# Altium PCB BLDC controller.PcbDoc (part 2 of 2)
Units mm, origin at the board's own origin, x right, y up, seen from the top; angles counter-clockwise.
Board outline 102.51 x 103.12 mm, 2 copper layers (Top Layer, Bottom Layer); 116 components, 83 nets, 325 pads, 163 vias.
Unrouted connection lines stored in the file: 1.
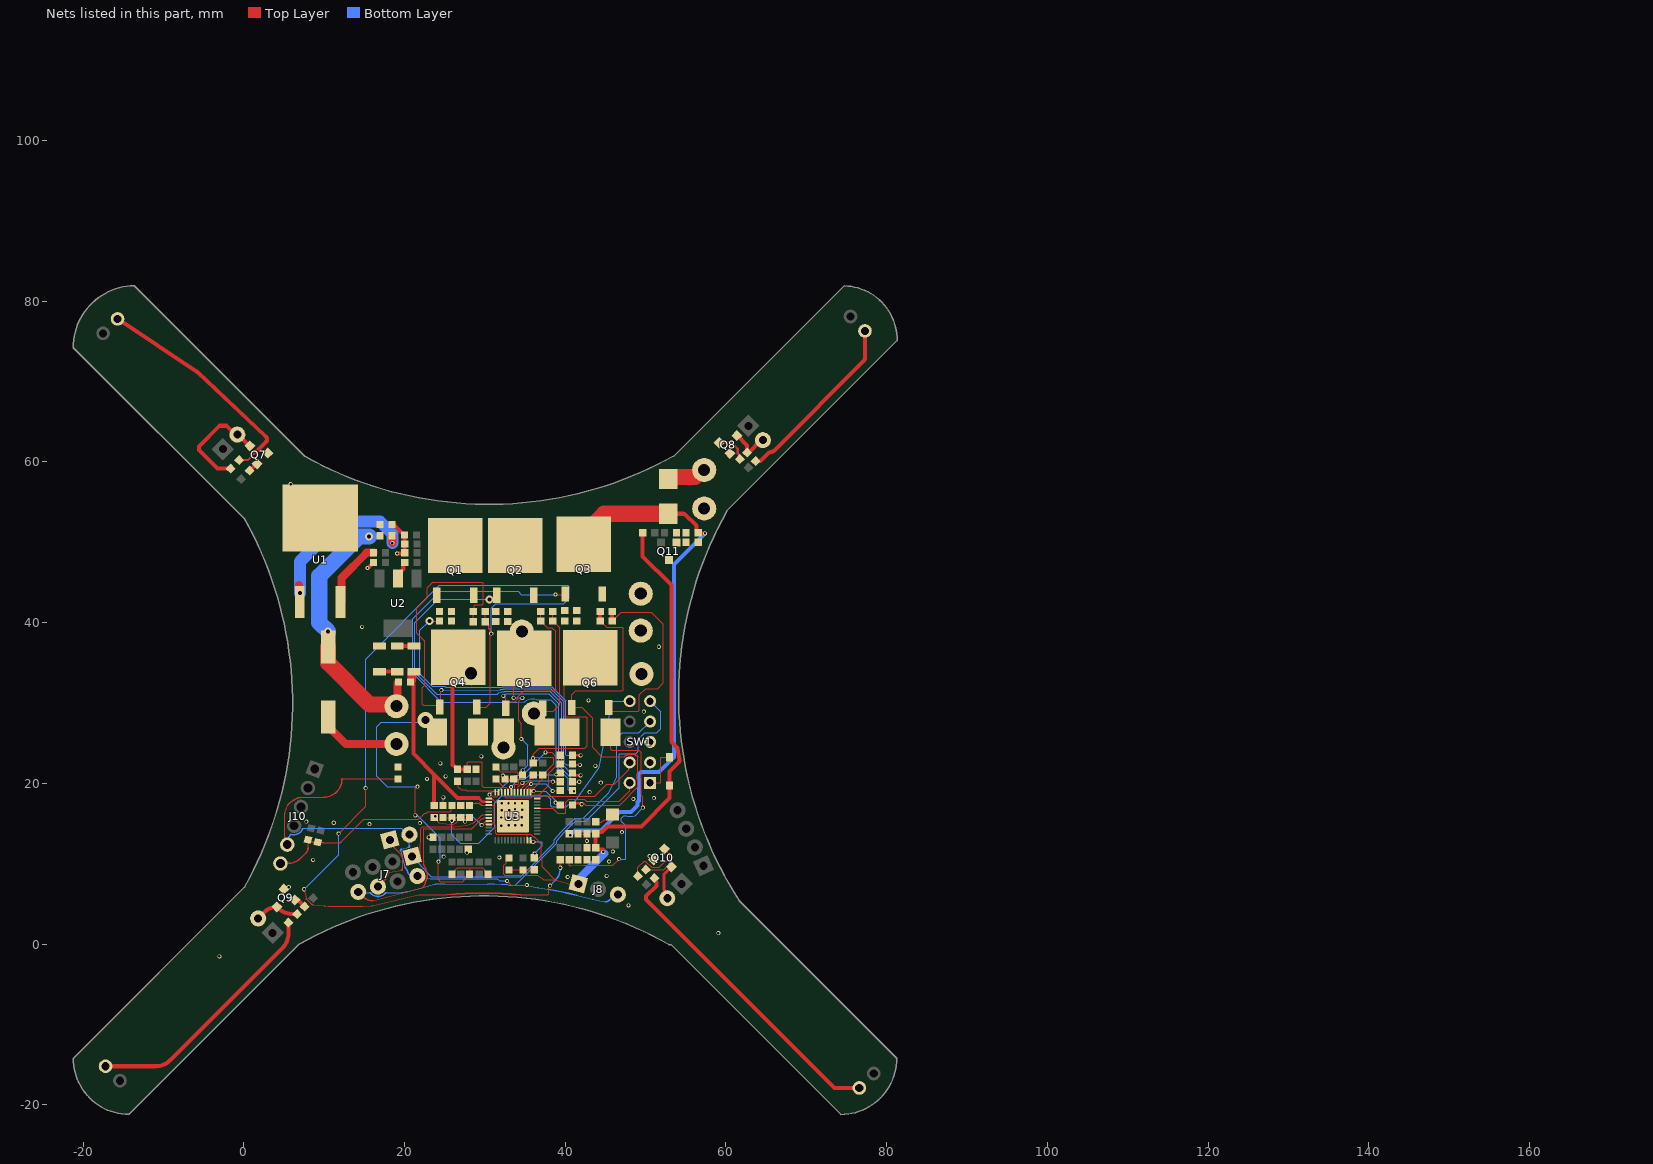
[diagram p2: the nets of this part, all layers, seen from the top]

## Via types
v1: diameter 0.5, hole 0.3, Top Layer to Bottom Layer, tented bottom, 152 vias
v2: diameter 1, hole 0.5, Top Layer to Bottom Layer, tented bottom, 6 vias
v3: diameter 4.3, hole 3.7, Top Layer to Bottom Layer, tented bottom, 4 vias
v4: diameter 2, hole 1, Top Layer to Bottom Layer, tented bottom, 1 vias

## Nets (pads, with @x,y where several pads share a name; then routed paths per layer and width w, separated by ;. In a path a pad name is that pad's centre, name@x,y a point inside that pad or via, vN(x,y) a via of type N, cw(c..) or ccw(c..) an arc to the next point about the centre after c; other vN are vias at no path point) (continued)
DGND: J6.2 J7.2 J8.3 J10.5 R1.2 | length 69.7
  Top Layer w0.15: J10.5@5.1,12.694 5.1,16.2 ; 5.111,16.257 5.465,17.271 ; 7.032,18.273 9.953,18.273 ; 12.23,20.55 R1.2@19.2,20.55 ; v1(32.779,7.855) 33.284,7.35 v1(35.225,7.35)
  Top Layer w0.2: J10.5@5.1,12.694 ccw(c5.417,12.694) J10.5@5.417,12.376 ; 5.1,16.2 cw(c5.3,16.191) 5.111,16.257 ; 5.465,17.271 cw(c5.654,17.204) 5.498,17.329 cw(c6.9,16.2) 5.785,17.613 cw(c8.213,14.536) 7.032,18.273 ; 9.953,18.273 ccw(c9.953,20.55) 12.23,20.55
  Bottom Layer w0.15: 7.317,14.321 7.346,14.35 7.403,14.407 7.45,14.409 18.823,14.409 18.851,14.416 18.972,14.416 18.979,14.409 19.517,14.409 19.671,14.409 19.88,13.629 J6.2@20.627,13.629 20.627,12.242 ; 19.514,11.563 20.032,9.631 ; 19.67,11.832 20.478,12.049 ; 20.074,9.549 20.076,9.546 ; J7.2@21.609,8.459 23.201,8.135 31.565,8.135 31.845,7.855 v1(32.779,7.855) ; v1(35.225,7.35) 36.616,7.018 ; 36.648,7.011 37.818,6.816 ; 41.414,6.074 43.412,5.583 ; 43.445,5.575 44.933,5.252 ; 45.558,5.511 J8.3@46.157,6.11
  Bottom Layer w0.2: J10.5@5.417,12.376 cw(c7.45,12.376) 5.797,13.559 cw(c7.45,12.376) 5.886,13.674 ccw(c6.272,14.725) 7.317,14.321 ; 19.514,11.563 cw(c19.727,11.62) 19.67,11.832 ; 20.032,9.631 ccw(c20.244,9.688) 20.074,9.549 ; 20.076,9.546 cw(c18.458,8.207) 20.434,8.919 ccw(c21.196,9.198) J7.2@21.196,8.386 ; 20.478,12.049 ccw(c20.427,12.242) 20.627,12.242 ; 36.616,7.018 ccw(c36.725,7.475) 36.648,7.011 ; 37.818,6.816 cw(c29.86,-40.866) 38.541,6.69 cw(c29.86,-40.866) 41.414,6.074 ; 43.412,5.583 ccw(c43.703,6.768) 43.445,5.575 ; 44.933,5.252 ccw(c44.933,6.136) 45.558,5.511
GND: C1.2 C2.2 C3.2 C4.2 C11.2 C12.2 C16.1 C17.1 C18.1 C19.1 C20.1 D2.1 pad.4 pad.10@32.312,24.463 pad.15 Q7.2 Q8.2 Q9.2 Q10.2 Q11.3 R1.1 R6.2 R18.1 R19.2 R20.2 R21.2 R24.1 R37.1 R39.1 R43.2 R58.1 SW1.3 SW1.5 U1.4 U3.0 U3.1 U3.24 | length 36.2
  Top Layer w0.15: C16.1@23.7,15.75 24.13,15.32 24.13,15.209 24.259,15.08 25.716,14.89 26.084,14.89 26.431,15.105 26.545,15.219 26.694,15.444 C17.1@27,15.75 C18.1@28.1,15.75 ; C20.1@24.8,17.25 24.8,18.175 v1@24.825,18.2 ; U3.1@30.5,18.1 U3.1@30.89,18.031 ; 31.021,17.97 32.306,16.897 32.851,16.442 U3.0@33.5,15.9 ; R21.2@32.5,20.55 R20.2@33.6,20.55 ; C4.2@41.6,13.65 R6.2@42.7,13.65 ; R39.1@42.7,12 R6.2@42.7,13.65 ; R6.2@42.7,13.725 R6.2@42.7,13.65
  Top Layer w0.2: U3.1@30.89,18.031 cw(c30.843,17.757) 31.021,17.97
  Top Layer w0.5: v1(15.4,46.8) 15.45,46.8 C2.2@16.15,47.5 ; C1.2@18.45,52.2 18.493,52.2 cw(c18.493,51.7) 18.847,52.053 19.471,51.429 C12.2@20,50.9 20.025,50.875 20.025,48.725 R18.1@20.05,48.7 19.95,48.6 v1(19.1,48.6)
  Top Layer w1: C3.2@10.5,28.25 10.5,27.1 12.7,24.9 pad.15@19,24.9
  Top Layer w2: pad.10@32.312,24.463 32.325,24.125 32.325,26.375 R24.1@32.35,26.4
  Bottom Layer w0.15: v1(36.025,12.725) 37.033,12.725 37.15,12.608 37.15,12.225 v1(36.2,11.275)
  other v1: -3.025,-1.525 59.057,1.362 47.875,4.825 5.6,7.075 40.3,8.35 45.15,8.495 45.471,10.278 8.633,10.48 31.8,10.775 24.885,10.875 50.5,10.95 27.775,11.375 45.925,11.525 42.7,12.825 23,13.275 47.075,13.925 32.025,14.725 33,14.775 33.775,14.775 34.575,14.8 15.65,14.925 21.925,15.05 11.2,15.1 7.8,15.225 27.55,15.225 32.936,15.741 33.696,15.741 32.05,15.75 34.6,15.775 23.825,15.925 32.1,16.65 33.025,16.65 34.675,16.7 33.751,16.777 32.95,17.5 32.1,17.525 33.75,17.525 34.625,17.525 48.475,18.05 51.042,18.163 24.837,18.271 43.05,18.9 44.425,20.1 22.8,20.55 25.114,20.883 32.25,20.975 43.75,22.175 24.464,22.489 29.561,23.354 49.8,28.925 42.9,30.325 51.65,37 14.725,39.475 5.825,57.225
HO1: C5.2 Q1.1 R7.2 R27.1 | length 37.6
  Top Layer w0.15: v2(23.1,40.2) C5.2@24.35,40.2
  Top Layer w0.3: R27.1@40.9,23.5 40.905,23.495 v1(41.932,23.495)
  Bottom Layer w0.15: v2(23.1,40.2) 21.925,39.025 21.925,33.609 23.434,32.1 25,32.1 25.071,32.029 25.094,32.006 25.138,31.962 25.199,31.962 31.841,31.974 31.851,31.984 32.186,31.984 32.249,32.047 38.353,32.047 40.1,30.3 40.1,23.563 40.188,23.475 v1@41.932,23.475
HO2: C6.2 Q2.1 R8.2 R32.1 | length 49.8
  Top Layer w0.15: v2(30.6,42.9) 31.125,42.9 31.5,43.275 Q2.1@31.5,43.4
  Top Layer w0.3: R32.1@40.9,21.1 41.005,20.995 v1(41.932,20.995)
  Top Layer w0.5: C6.2@31.35,40.15 C6.2@31.425,40.225 ; Q2.1@31.425,43.325 Q2.1@31.5,43.4
  Bottom Layer w0.15: v2(30.6,42.9) 24.2,42.9 21.305,40.005 21.305,33.801 24.006,31.1 31.571,31.1 31.749,31.278 32.102,31.378 32.437,31.378 32.5,31.441 38.101,31.441 39.493,30.049 39.494,23.312 39.546,22.426 40.856,21.083 40.944,20.995 v1(41.932,20.995)
HO3: C7.2 Q3.1 R9.2 R41.1 | length 59.2
  Top Layer w0.15: v1(38.8,43.5) 39.95,43.5 Q3.1@39.975,43.525
  Top Layer w0.3: R41.1@40.994,19 v1(41.1,19)
  Top Layer w0.5: R9.2@39.95,40.2 R9.2@39.975,40.225 ; Q3.1@39.975,43.525 Q3.1@40,43.55
  Bottom Layer w0.15: v1(38.8,43.5) 34.556,43.5 34.131,43.925 24.425,43.925 21.002,40.502 21.002,33.675 24.574,30.103 33.963,30.103 34.91,30.175 34.94,30.177 cw(c36.531,27.154) 35.695,30.466 cw(c35.731,30.321) 35.732,30.471 cw(c35.711,26.817) 36.451,30.395 38.202,30.395 38.887,29.71 38.887,22.066 40.4,20.553 40.4,19.2 40.6,19 v1(41.1,19)
IA: C8.1 Q4.3 R11.1 R22.2 R33.2 | length 126
  Top Layer w0.15: v1@7.5,6.725 7.781,5.673 ; v1@7.525,6.785 v1(7.525,6.825) ; 7.838,5.575 8.475,4.938 ; 8.61,4.875 10.089,4.741 10.091,4.741 ; 10.104,4.74 10.56,4.701 ; 10.577,4.7 14.825,4.7 15.968,4.78 ; v1(11.8,13.75) 15.2,17.15 v1@15.2,19.375 ; 16.015,4.787 21.69,6.127 21.696,6.129 25.149,6.133 25.274,6.133 ; Q4.3@29,29.5 30.2,29.5 30.7,30 30.7,39 ; R11.1@30.05,41.4 C8.1@30.05,40.1 C8.1@30.441,39.709 ; 30.5,39.366 30.5,39.567 ; 30.559,39.224 30.641,39.142 ; 34.439,6.133 37.808,6.133 37.925,6.25 37.925,7.062 v1(38.134,7.261) ; v1(39.4,9.5) R33.2@39.4,10.5
  Top Layer w0.2: v1@7.5,6.725 ccw(c7.44,6.785) v1@7.525,6.785 ; 7.781,5.673 ccw(c7.994,5.73) 7.838,5.575 ; 8.475,4.938 ccw(c8.63,5.094) 8.61,4.875 ; 10.091,4.741 ccw(c10.333,7.433) 10.103,4.74 ; 10.56,4.701 ccw(c10.577,4.9) 10.577,4.7 ; 15.968,4.78 ccw(c15.947,5.074) 16.015,4.787 ; 25.274,6.132 25.283,6.133 cw(c29.86,-40.866) 34.439,6.133 ; C8.1@30.441,39.709 cw(c30.3,39.567) 30.5,39.567 ; 30.5,39.366 ccw(c30.7,39.366) 30.559,39.224 ; 30.641,39.142 cw(c30.5,39) 30.7,39
  Bottom Layer w0.15: v1(7.525,6.825) 11.8,11.1 v1(11.8,13.75) ; v1(15.175,19.4) 15.175,35.475 24.325,44.625 40.3,44.625 40.525,44.4 40.525,43.025 39.85,42.35 31.35,42.35 30.8,41.8 v1(30.8,38.625) ; v1(38.134,7.261) 38.134,7.265 38.727,7.877
  Bottom Layer w0.2: 38.727,7.877 cw(c38.871,7.738) 38.728,7.878 ccw(c37.107,9.5) v1(39.4,9.5)
IC: C10.1 Q6.3 R13.1 R23.2 R31.2 | length 55.2
  Top Layer w0.15: R31.2@40.5,10.5 40.5,9.838 40.544,9.794 40.588,9.75 40.712,9.75 42.287,9.806 45.372,9.806 45.378,9.8 45.809,9.794 45.933,9.794 v1(46.719,10.58) ; Q6.3@45.4,29.45 45.4,29.375 45.775,29 49.083,29 49.2,29.117 49.2,31 50,31.8 51.5,31.8 52.2,32.5 52.2,39.8 50.7,41.3 46.95,41.3 C10.1@45.85,40.2 ; R23.2@45.65,26.4 45.65,24.242 45.767,24.125 49.175,24.125 49.45,23.85 49.45,18.523 49.675,18.298 v1(49.675,16.975)
  Top Layer w0.5: C10.1@45.85,40.2 R13.1@45.85,41.4
  Bottom Layer w0.15: v1(46.719,10.58) 46.742,10.557 47.467,10.557 47.555,10.645 47.555,14.73 47.467,14.818 47.277,14.997 46.997,15.277 46.997,15.673 47.277,15.953 47.673,15.953 47.797,15.937 48.413,15.937 48.689,15.989 v1(49.675,16.975)
ISUM: C9.1 pad.10@36.1,28.7 Q5.3 R12.1 R22.1 R23.1 R24.2 R28.2 R29.2 R46.2 | length 57
  Top Layer w0.15: v1(21.35,16.025) 21.35,19.325 v1(21.625,19.6) ; v1(24.235,10.251) 24.175,10.191 24.175,8.075 24.465,7.785 27.261,7.785 27.645,8.169 27.645,8.245 R29.2@28.1,8.7 28.2,8.8 28.2,9.413 28.083,9.53 ; R28.2@25.9,8.7 26.33,9.13 26.33,9.241 26.619,9.53 28.083,9.53 ; R46.2@30.1,8.4 R46.2@30.4,8.7 29.97,9.13 29.97,9.241 29.681,9.53 28.083,9.53 ; Q5.3@37.2,29.35 37.55,29 38.5,29 39.3,29.8 39.3,39.35 R12.1@38.45,40.2 C9.1@38.45,41.4
  Bottom Layer w0.15: v1(21.35,16.025) 21.6,16.025 24.44,13.185 24.44,10.551 24.235,10.346 v1(24.235,10.251) ; v1(21.625,19.6) 17.85,19.6 16.55,20.9 16.55,27.025 17.1,27.575 22.275,27.575 v4(22.6,27.9)
LO1: C8.2 Q4.1 R11.2 R30.1 | length 59.7
  Top Layer w0.15: v1@24.5,31.6 24.5,29.6 Q4.1@24.4,29.5 24.2,29.7 22.317,29.7 22.2,29.817 22.2,31.889 22.52,32.209 22.52,37.68 21.5,38.7 21.5,41.8 22.825,43.125 22.825,44.325 23.5,45 29.683,45 29.8,44.883 29.8,42.334 29.683,42.217 28.817,42.217 28.7,42.1 28.7,41.55 R11.2@28.55,41.4 C8.2@28.55,40.1 ; R30.1@40.9,22.3 40.905,22.295 v1(41.832,22.295)
  Bottom Layer w0.15: v1(24.582,31.595) 31.955,31.659 31.977,31.681 32.312,31.681 32.375,31.744 38.226,31.744 39.797,30.173 39.797,23.437 39.849,22.551 40.105,22.295 v1(41.832,22.295)
LO2: C9.2 Q5.1 R12.2 R40.1 | length 38.8
  Top Layer w0.15: v1(32.3,30.9) 32.3,30.828 32.6,30.528 Q5.1@32.6,29.825 ; Q5.1@32.6,29.35 32.6,29.772 33,30.172 33.773,30.172 34.125,30.524 34.125,30.776 34.849,31.5 38.6,31.5 ; C9.2@36.95,41.4 R12.2@36.95,40.2 37.775,39.375 38.325,39.375 38.8,38.9 38.8,31.7 ; R40.1@41.309,20.2 v1(41.75,20.2)
  Top Layer w0.2: 38.6,31.5 ccw(c38.6,31.7) 38.8,31.7
  Bottom Layer w0.15: v1(32.3,30.9) 32.388,30.9 32.626,31.138 37.975,31.138 39.19,29.923 39.19,22.192 40.937,20.445 40.937,20.166 41.716,20.166 v1(41.75,20.2)
LO3: C10.2 Q6.1 R13.2 R42.1 | length 46.3
  Top Layer w0.15: 42.193,17.6 42.274,17.6 42.574,17.3 46.799,17.3 47.027,17.528 ; C10.2@44.35,40.2 45.15,39.4 47.083,39.4 47.2,39.283 47.2,31.617 47.083,31.5 41.3,31.5 40.8,31 Q6.1@40.8,29.45 42.05,29.45 43.4,28.1 43.4,24.5 44.516,23.384 44.575,23.325 47.372,23.325 ; 47.028,17.528 49.05,19.55 49.05,23.325
  Top Layer w0.2: 47.372,23.325 cw(c48.211,22.413) 49.05,23.325
  Top Layer w0.3: R42.1@40.969,17.1 41.369,17.5 v1@42.05,17.5
  Top Layer w0.5: C10.2@44.35,40.2 R13.2@44.35,41.4
  other v1: 42.043,17.4
MCU_5V: C17.2 C18.2 D3.K J8.1 J10.6 R14.1 R36.2 R38.2 R48.2 R59.2 R61.2 R62.2 U3.3 U3.9 U3.23 | length 111.4
  Top Layer w0.15: J10.6@4.562,10.027 J10.6@5.375,10.027 ; 7.171,10.771 7.7,11.3 ; 8.006,12.038 R61.2@8.006,12.976 ; 8.73,12.676 R62.2@9.206,12.676 R62.2@9.35,12.735 ; 9.9,12.6 11.917,12.6 ; 12.058,12.658 14.925,15.525 21.725,15.525 22.5,16.3 22.722,16.3 22.897,16.475 25.712,16.475 25.8,16.563 25.8,17.15 R48.2@25.9,17.25 ; 29.007,17.528 29.253,17.528 ; 29.396,17.469 29.522,17.343 ; 29.663,17.285 30.093,17.285 ; U3.9@30.5,14.9 30.515,14.915 30.907,14.915 31.2,15.208 ; U3.3@30.5,17.3 31.006,17.283 ; 31.2,17.085 31.2,15.208 ; R36.2@33,10.725 32.65,10.375 32.65,10.086 32.355,9.791 32.355,8.694 32.469,8.58 36.528,8.57 37.095,8.215 37.139,8.171 37.154,8.156 37.25,8.06 37.309,8.001 38.867,8.001 ; U3.23@35.3,12.9 35.3,13.655 35.275,13.68 ; J8.1@41.647,7.482 41.492,7.328 41.448,7.284 41.323,7.284 38.95,7.957 38.867,8.001 ; 31.2,15.208 31.28,13.867 31.409,13.739 31.467,13.68 35.275,13.68 ; 35.275,13.68 35.728,13.68 36.043,13.365 36.125,13.365 37.045,12.445 37.045,10.733 37.125,10.653 37.125,9.632 37.865,8.892 38.19,8.516 38.521,8.185 38.867,8.001
  Top Layer w0.2: J10.6@5.375,10.027 ccw(c5.375,12.567) 7.171,10.771 ; 7.7,11.3 ccw(c6.962,12.038) 8.006,12.038 ; R61.2@8.006,12.976 ccw(c8.73,13.7) 8.73,12.676 ; R62.2@9.35,12.735 cw(c9.427,12.55) 9.542,12.714 ccw(c9.9,13.22) 9.9,12.6 ; 11.917,12.6 ccw(c11.917,12.8) 12.058,12.658 ; C18.2@28.1,17.25 cw(c28.998,15.939) 29.007,17.528 ; 29.253,17.528 cw(c29.254,17.328) 29.396,17.469 ; 29.522,17.343 ccw(c29.663,17.485) 29.663,17.285 ; 31.006,17.283 cw(c31,17.084) 31.2,17.086
  Top Layer w0.5: R38.2@43.8,12 44,11.8 44.73,11.8 v1(44.73,11.47) ; R38.2@43.8,12.25 R14.1@43.8,13.725 44,13.925 44.572,13.925 45.272,14.625 49.475,14.625 53,18.15 D3.K@53,19.75 53,21.467 54.058,22.524 ccw(c53.704,22.878) 54.198,22.959 cw(c128.493,35.203) 53.994,24.266 ccw(c53.499,24.194) 53.853,24.547 53.346,25.054 cw(c53.7,25.407) 53.2,25.405 53.2,44.7 49.65,48.25 R59.2@49.65,51.2
  Bottom Layer w1: J8.1@41.247,7.557 41.247,7.647 v1@44.9,11.3
NetC13_2: C13.2 U3.48 | length 6
  Top Layer w0.15: C13.2@26.7,20.639 26.7,19.525 27.045,19.18 27.645,19.18 27.755,19.07 31.215,19.07 31.3,18.985 U3.48@31.3,18.9
NetC14_2: C14.2 U3.44 | length 2.4
  Top Layer w0.15: C14.2@31.4,20.55 31.775,20.175 31.775,20.099 32.176,19.698 32.333,19.541 32.616,19.541 32.845,19.312 32.845,18.955 U3.44@32.9,18.9
NetC15_2: C15.2 U3.40 | length 2.6
  Top Layer w0.12: U3.40@34.5,18.9 34.555,18.955 34.555,19.323 35.635,20.403 35.635,20.635 35.65,20.65 C15.2@36,20.65
NetD1_1: D1.1 D5.2 | length 2.1
  Top Layer w0.5: D5.2@19.1,37.1 D1.1@21.2,37.1
NetD1_2: 
NetD2_2: D2.2 D5.1 | length 2.2
  Top Layer w0.5: D2.2@16.9,33.9 D5.1@19.1,33.9
NetD3_A: D3.A SW1.1 | length 5.6
  Top Layer w0.15: SW1.1@50.569,20.071 51.9,20.071 51.9,23.25 D3.A@53,23.25
NetD4_1: D4.1 pad.5 | length 5
  Top Layer w2: D4.1@52.8,57.85 52.8,57.95 52.95,58.1 56.129,58.1 57.029,59 pad.5@57.3,59
NetJ6_1: J6.1 J7.6 | length 8.3
  Top Layer w0.15: J7.6@16.702,7.145 17.577,8.019 ; 18.118,8.914 19.585,9.176 ; J6.1@18.487,12.213 19.614,11.086 ; 19.666,10.995 19.691,10.903 ; 19.698,10.857 19.717,10.299 ; 19.717,10.295 19.749,9.379
  Top Layer w0.2: 17.577,8.019 ccw(c16.615,8.981) 17.955,8.751 cw(c18.152,8.717) 18.118,8.914 ; J6.1@18.173,12.971 ccw(c19.247,12.971) J6.1@18.487,12.213 ; 19.585,9.176 ccw(c19.549,9.373) 19.749,9.379 ; 19.614,11.086 cw(c19.473,10.944) 19.666,10.995 ; 19.691,10.903 cw(c19.498,10.85) 19.698,10.857 ; 19.717,10.295 ccw(c18.498,10.255) 19.717,10.299
NetLED1_1: LED1.1 R14.2 | length 2.5
  Top Layer w0.15: R14.2@43.8,15.15 44.513,15.15 44.837,15.475 45.175,15.475 45.85,16.15 LED1.1@45.9,16.15
NetLED2_2: LED2.2 R52.1 | length 39.6
  Top Layer w0.5: R52.1@51.1,8.2 51.1,7.917 51.307,7.71 51.351,7.666 51.351,7.251 50.057,5.957 50.057,5.543 73.498,-17.898 LED2.2@76.602,-17.898
NetLED3_2: LED3.2 R49.1 | length 28.7
  Top Layer w0.254: R49.1@-0.57,60.23 0.489,60.23 1.445,61.186
  Top Layer w0.5: LED3.2@-15.704,77.796 -5.835,71.223 ; -5.834,71.223 cw(c-6.112,70.807) -5.768,71.17 2.74,63.169 cw(c2.397,62.804) 2.75,62.45 1.585,61.285 cw(c1.231,61.638) 1.445,61.186
NetLED4_2: LED4.2 R50.1 | length 22.3
  Top Layer w0.5: R50.1@63.7,60.1 64.093,60.1 ccw(c64.093,60.6) 64.446,60.246 65.266,61.066 cw(c65.619,60.712) 65.541,61.206 ; 65.543,61.206 ccw(c65.395,62.16) 66.079,61.479 77.151,72.551 ccw(c76.798,72.905) 77.298,72.905 LED4.2@77.298,76.302
NetLED5_2: LED5.2 R51.1 | length 31.4
  Top Layer w0.5: LED5.2@-17.198,-15.202 -10.954,-15.202 ccw(c-10.954,-12.662) -9.158,-14.458 4.826,-0.474 ccw(c3.03,1.322) 5.57,1.322 R51.1@5.57,2.67
NetQ7_1: Q7.1 R53.2 | length 1.3
  Top Layer w0.5: R53.2@0.73,58.93 0.78,58.93 1.607,59.756 Q7.1@1.656,59.756
NetQ8_1: Q8.1 R54.2 | length 4
  Top Layer w0.3: Q8.1@59.15,62.394 60.706,62.394 61.471,61.629 61.471,61.053 61.739,60.785 R54.2@61.739,60.361
NetQ9_1: Q9.1 R55.2 | length 1.5
  Top Layer w0.5: Q9.1@6.35,5.506 cw(c6.35,4.58) 7.005,5.235 R55.2@7.57,4.67
NetQ10_1: Q10.1 R56.2 | length 7.5
  Top Layer w0.15: R56.2@49.039,8.461 49.039,9.539 49.838,10.338 49.962,10.338 50.769,9.531 51.7,9.531 53,10.831 53,11.212 52.881,11.331 52.856,11.331 Q10.1@52.344,11.844
NetQ11_1: Q11.1 R57.2 R58.2 R60.1
NetR3_2: R3.2 U1.1 | length 22.3
  Top Layer w1: 6.9,44.7 6.9,42.628 U1.1@6.96,42.568 ; R3.2@18.45,50.8 18.5,50.75 v1(18.5,49.9)
  Bottom Layer w1.5: v2(7,43.7) 7,47.6 12.008,52.608 16.942,52.608 18.5,51.05 v1(18.5,49.9)
NetR4_1: R4.1 U1.3 | length 8.3
  Top Layer w1: U1.3@12.04,42.568 12.15,42.678 12.15,45.55 15.3,48.7 R4.1@16.15,48.7
NetR10_2: R10.2 U2.2 | length 2.4
  Top Layer w0.5: U2.2@19.2,45.5 19.2,46 19.85,46.65 19.85,47.3 R10.2@20.05,47.5
NetR27_2: R27.2 U3.47 | length 13
  Top Layer w0.15: v1(30.587,18.6) 30.757,18.6 31.052,18.305 31.462,18.305 31.66,18.503 31.66,18.86 U3.47@31.7,18.9 U3.47@31.74,18.86 ; v1(37.55,23.85) 38.3,23.85 38.813,23.337 39.237,23.337 R27.2@39.4,23.5
  Bottom Layer w0.15: v1(30.587,18.6) 30.987,19 31.7,19 33.713,21.013 34.738,21.013 37.55,23.825 v1(37.55,23.85)
NetR30_2: R30.2 U3.45 | length 10.1
  Top Layer w0.12: U3.45@32.5,18.9 32.555,18.845 32.555,18.27 32.625,18.2 35.775,18.2 36.17,18.595 36.795,18.595 37.95,19.75 37.95,21.25 38.84,22.14 39.14,22.14 R30.2@39.4,22.4
NetR32_2: R32.2 U3.43 | length 7
  Top Layer w0.12: v1(33.258,19.547) 33.279,19.526 33.279,18.921 U3.43@33.3,18.9
  Bottom Layer w0.12: v1(33.258,19.547) 33.258,19.604 34.142,20.488 34.955,20.488 35.567,21.1 v1(38.9,21.1)
NetR34_2: R34.2 R36.1 R37.2 | length 3.2
  Top Layer w0.15: R36.1@33,9.225 R34.2@34.75,9.225 34.775,9.25 R37.2@36.15,9.25
NetR35_2: R35.2 R38.1 R39.2
NetR40_2: R40.2 U3.41 | length 6.3
  Top Layer w0.12: U3.41@34.1,18.9 34.155,18.955 34.155,19.555 34.658,20.058 v1(34.681,20.058)
  Top Layer w0.15: v1(38.475,20.225) 39.375,20.225 R40.2@39.4,20.2
  Bottom Layer w0.12: v1(34.681,20.058) 34.784,20.058 34.974,20.248 35.054,20.248 35.162,20.355 38.242,20.355 38.372,20.225 v1(38.475,20.225)
NetR41_2: R41.2 U3.39 | length 5.8
  Top Layer w0.12: U3.39@34.9,18.615 U3.39@34.9,18.9 34.9,19.185 35.005,19.29 35.005,19.341 35.516,19.852 35.702,19.852 v1(35.775,19.925) ; v1(38.45,19.05) 39.35,19.05 R41.2@39.4,19.1
  Bottom Layer w0.12: v1(35.775,19.925) 37.575,19.925 v1(38.45,19.05)
NetR42_2: R42.2 U3.37 | length 3.9
  Top Layer w0.15: U3.37@35.7,18.9 35.73,18.87 35.9,19.04 36.06,19.04 v1(36.075,19.025)
  Bottom Layer w0.15: v1(36.075,19.025) 37.586,19.025 38.8,17.811 v1(38.8,17.6)
PA: C5.1 C13.1 pad.10@28.3,33.7 pad.10@49.5,33.6 Q1.3 Q4.4 R7.1 R15.2 U3.46 | length 26.5
  Top Layer w0.15: R15.2@27.8,21.856 27.8,22.583 27.917,22.7 29.583,22.7 29.7,22.583 29.7,19.637 29.817,19.52 31.837,19.52 32.06,19.297 32.06,18.94 32.097,18.903 U3.46@32.1,18.9
  Top Layer w0.5: Q4.4@27.1,33.7 27.1,35.3 Q4.4@26.7,35.7 26,35 26,22.315 26.035,22.315 C13.1@26.6,21.75 R15.2@27.8,21.75
PB: C6.1 C14.1 pad.10@34.6,38.9 pad.11 Q2.3 Q5.4 R8.1 R16.2 U3.42 | length 23.3
  Top Layer w0.12: C14.1@31.4,22.05 31.87,21.58 31.87,21.525 31.975,21.42 33.885,21.42 R16.2@34.4,20.905 ; U3.42@33.7,18.9 33.7,19.85 33.77,19.92 34.16,19.92 34.23,19.99 34.23,20.58 R16.2@34.7,21.05 ; v1(34.55,25.525) 34.55,27.447 34.225,27.772 34.225,30.2 v1(34.675,30.65) ; R16.2@34.675,21.05 34.7,21.075 v1(34.7,21.625)
  Top Layer w0.15: v1(33.575,30.65) 33.575,34.225 Q5.4@34.9,35.55
  Bottom Layer w0.12: v1(33.575,30.65) v1(34.675,30.65) ; v1@34.6,25.5 35.35,24.75 35.35,22.275 v1(34.7,21.625)
PC: C7.1 C15.1 pad.12 Q3.3 Q6.4 R9.1 R17.2 U3.38 | length 33.1
  Top Layer w0.12: U3.38@35.3,18.9 35.355,18.955 35.355,19.291 35.544,19.48 36.155,19.48 37.165,20.49 37.165,20.915 R17.2@37.2,20.95 ; C15.1@36.249,22.251 35.975,22.525 35.902,23.113 35.9,23.125 v1(36,23.125) ; 36.71,21.44 36.81,21.44 R17.2@37.2,21.05 38.575,22.425 38.575,23.15 38.45,23.275 37.351,23.275 37.326,23.25 36.228,23.25 36.103,23.125 v1(36,23.125) ; Q6.4@43.1,35.65 39.875,32.425 39.875,28.35 39.945,28.28 42.625,28.28 42.75,28.155 42.75,24.65 42.45,24.35 36.75,24.35 36,23.6 v1(36,23.125)
RST: C20.2 R48.1 SW1.10 U3.8 | length 45.6
  Top Layer w0.15: C20.2@24.8,15.75 R48.1@25.9,15.75 ; v1(29.6,14.8) 29.985,15.185 30.053,15.253 30.453,15.253 U3.8@30.5,15.3
  Bottom Layer w0.15: v1(25.9,15.335) v1@25.967,15.267 ; v1(29.6,14.8) 28.275,16.125 26.825,16.125 v1@25.967,15.267 ; SW1.10@48.029,30.231 45.938,30.231 45.894,30.187 45.85,30.143 44.228,21.977 41.192,17.738 41.104,17.65 40.75,17.65 40.162,17.062 38.338,17.062 38.2,17.2 38.2,18.029 37.784,18.445 32.095,18.445 31.253,17.603 31.253,14.547 29.245,12.54 26.96,12.54 25.9,13.6 25.9,15.2 v1@25.967,15.267
RX: J7.8 SW1.9 U3.7 | length 78.6
  Top Layer w0.15: J7.8@14.249,6.487 J7.8@14.866,5.87 ; 16.051,5.407 22.227,7.024 22.28,7.038 ; 22.375,9.87 22.375,10.093 22.396,10.115 22.396,10.235 22.375,10.314 22.375,14.35 28.364,14.35 29.614,15.6 29.8,15.6 29.947,15.747 30.113,15.747 30.145,15.715 30.2,15.715 30.215,15.7 U3.7@30.5,15.7
  Top Layer w0.2: J7.8@14.866,5.87 ccw(c16,7.004) 16,5.4 ccw(c16,5.6) 16.051,5.407 ; 22.28,7.038 ccw(c21.508,7.81) 22.594,7.696 ccw(c21.508,7.81) 22.598,7.745 ccw(c21.609,8.459) 22.829,8.459 ccw(c20.41,8.459) 22.41,9.821 ccw(c20.41,8.459) 22.375,9.87
  Bottom Layer w0.15: J7.8@14.336,6.4 15.641,6.4 ; 17.763,6.4 19.1,6.4 19.699,6.4 ; 20.336,6.528 23.731,7.437 23.751,7.442 23.826,7.442 23.891,7.507 25.013,7.507 25.016,7.504 30.361,7.448 ; 30.363,7.448 cw(c29.86,-40.866) 32.9,7.355 33.048,7.345 33.767,7.338 38.965,12.536 38.965,12.87 39.863,13.888 40.906,14.931 41.343,15.31 42.585,15.31 46.681,19.406 46.725,19.45 46.726,20.597 46.726,23.612 46.814,23.7 48.8,23.7 49.1,24 49.1,25.483 49.917,26.3 51.4,26.3 51.9,26.8 51.9,28.9 SW1.9@50.569,30.231
  Bottom Layer w0.2: J7.8@14.249,6.487 ccw(c14.336,6.487) J7.8@14.336,6.4 ; 15.641,6.4 cw(c15.642,6.2) 15.791,6.333 ccw(c16.702,7.145) 17.613,6.333 cw(c17.762,6.2) 17.763,6.4 ; 19.699,6.4 ccw(c19.699,6.6) 19.741,6.404 cw(c29.86,-40.866) 20.324,6.525 ccw(c20.284,6.721) 20.336,6.528
SWCLK: SW1.4 U3.36 | length 13.9
  Top Layer w0.15: U3.36@36.5,18.1 36.54,18.14 36.825,18.14 37.13,18.445 37.784,18.445 37.829,18.4 43.7,18.4 45.2,19.9 46.1,19.9 47.924,21.724 47.924,22.506 SW1.4@48.029,22.611
SWDIO: SW1.2 U3.33 | length 15
  Top Layer w0.15: U3.33@36.5,16.9 38.449,16.9 39.049,16.3 40.1,16.3 40.1,17.676 40.454,18.03 42.358,18.03 42.638,17.75 46.718,17.75 48.029,19.061 SW1.2@48.029,20.071
TX: J7.1 SW1.7 U3.6 | length 55.6
  Top Layer w0.15: J7.1@20.951,10.913 21.855,10.913 21.972,11.03 22.054,14.176 22.105,14.462 22.263,14.62 26.196,14.62 27.734,14.78 28.631,15.105 29.661,16.1 U3.6@30.5,16.1
  Bottom Layer w0.15: J7.1@20.951,10.913 22.285,9.471 22.41,9.346 22.423,9.334 cw(c21.609,8.459) 22.566,9.174 22.635,9.083 22.637,9.082 23.313,8.405 34.452,8.405 38.645,12.598 38.645,13.003 39.56,14.014 40.78,15.234 41.167,15.586 41.21,15.63 42.287,15.73 45.184,18.555 45.445,18.816 46.423,20.722 46.423,23.738 46.467,25.667 47.1,26.3 49.178,26.3 SW1.7@50.569,27.691
V_Bat: C1.1 C3.1 D4.2 pad.13 Q1.4 Q2.4 Q3.4 R2.1 R3.1 R5.1 R57.1 | length 101
  Top Layer w0.5: pad.13@18.809,29.791 pad.13@19.125,30.108 ; R5.1@19.125,32.475 R5.1@19.25,32.6 R5.1@19.25,32.8 ; R2.1@40.5,13.725 40.5,13.709 v1(40.644,13.565) ; D4.2@52.8,53.55 54.643,53.55 cw(c54.643,53.05) 54.997,53.403 56.204,52.196 cw(c55.85,51.843) 56.35,51.843 56.35,51.4 R57.1@56.55,51.2 56.65,51.1 v1(57.4,51.1)
  Top Layer w1: C3.1@10.5,36.95 10.5,38.1 C3.1@10.9,38.5 ; pad.13@19.125,30.108 R5.1@19.125,32.475
  Top Layer w2: C3.1@10.5,36.95 10.5,35 15.709,29.791 pad.13@18.809,29.791 ; Q1.4@26.3,49.6 Q1.4@26.3,49.65 ; Q3.4@41.1,49.8 44.85,53.55 D4.2@52.8,53.55
  Bottom Layer w0.5: v1(40.644,13.565) 41.229,14.15 44.475,14.15 46.74,16.415 46.954,16.415 ccw(c46.954,16.915) 47.079,16.431 47.871,16.431 ccw(c47.996,16.915) 47.995,16.415 47.996,16.415 48.215,16.415 49.022,17.222 49.022,17.674 49.182,17.834 49.182,20.549 49.149,20.582 49.149,21.107 49.442,21.4 51.7,21.4 53.55,23.25 53.55,47.25 v1(57.4,51.1)
  Bottom Layer w2: v2(10.5,38.9) 9.4,40 9.4,45.8 14.3,50.7 v2(15.6,50.7)
V_Bat_MCU: C16.2 D1.2 R5.2 U3.2 | length 27.5
  Top Layer w0.3: 29.2,18.2 29.7,17.7 U3.2@30.5,17.7
  Top Layer w0.5: R5.2@20.75,32.6 21.1,32.25 21.1,23.7 23.8,21 26.6,18.2 29.2,18.2 ; R5.2@21.2,32.65 21.2,33.85 D1.2@21.2,33.9 ; C16.2@23.7,17.25 23.7,20.9
  Top Layer w0.8: R5.2@20.75,32.6 20.8,32.65 20.8,33.85 20.85,33.9 D1.2@21.2,33.9
W1: J1.2 Q7.3 R49.2 | length 13.8
  Top Layer w0.5: R49.2@-1.63,59.17 -3.27,59.17 -5.593,61.493 -5.593,61.907 -3,64.5 -2.175,64.5 -1.073,63.398 J1.2@-0.802,63.398 -0.722,63.398 0.692,61.984 Q7.3@0.773,61.984
W2: J2.2 Q8.3 R50.2 | length 5.3
  Top Layer w0.5: Q8.3@61.378,63.278 61.422,63.278 62.639,62.061 R50.2@62.639,61.161 62.848,61.161 64.389,62.702 J2.2@64.598,62.702
W3: J3.2 Q9.3 R51.2 | length 5.6
  Top Layer w0.5: J3.2@1.802,3.198 2.593,3.989 cw(c4.122,2.459) Q9.3@4.122,4.622 4.27,4.474 ccw(c6.066,6.27) 6.066,3.73 R51.2@6.63,3.73
W4: J4.2 Q10.3 R52.2 | length 7.8
  Top Layer w0.15: R52.2@50.039,9.261 52.271,9.261 52.626,9.616 Q10.3@53.227,9.616
  Top Layer w0.4: J4.2@52.704,5.704 52.398,6.01 52.398,6.64 52.3,6.738 52.3,8.689 Q10.3@53.227,9.616
pads on no net: J7.4 J7.5 J10.1 SW1.6 SW1.8 U2.4
copper on no net:
  other v1: 43.725,19.275 45.35,20.8
  other v3: -7,-6.8 67.3,-6.8 -7,67.6 67.3,67.6

## Polygon pours and split planes (outlines as drawn)
GND on Bottom Layer "NONET_L02_P001" (solid, remove dead copper, shelved, pour order 1): -14.475,83.125 -18.71,82.025 ccw(c-18.71,79.485) -21.25,79.485 -21.25,72.3 -1,53.125 3.325,43.675 4.675,27.1 -0.85,7.725 -22.4,-13.975 -20.025,-20.9 -16.6,-22.15 -11.725,-20.275 9.6,0.675 32.8,5.075 52,-0.4 74.025,-21.675 80.425,-20.225 82.55,-12 61.6,7.05 55.325,27.55 58.475,48.225 75.575,67.125 84.725,75.925 75.925,83.475 68.9,78.25 50.3,60.125 32.75,55.625 14.325,59 -13.025,83.125
GND on Top Layer "NONET_L01_P003" (solid, remove dead copper, shelved, pour order 3): -14.602,83.075 -18.837,81.975 ccw(c-18.837,79.435) -21.377,79.435 -21.377,72.25 -1.127,53.075 3.198,43.625 4.548,27.05 -0.977,7.675 -22.527,-14.025 -20.152,-20.95 -16.727,-22.2 -11.852,-20.325 9.473,0.625 32.673,5.025 51.873,-0.45 73.898,-21.725 80.298,-20.275 82.423,-12.05 61.473,7 55.198,27.5 58.348,48.175 75.448,67.075 84.598,75.875 75.798,83.425 68.773,78.2 50.173,60.075 32.623,55.575 14.198,58.95 -13.152,83.075

## Keep-outs
Keep-Out Layer:
  lines w0.15: -21.213,74.213 0.053,52.947 ; -21.2,-14.2 0.1,7.1 ; -14.3,-21.2 6.9,0 ; -13.613,81.913 7.6,60.7 ; 52.912,-0.052 53.152,-0.052 74.307,-21.207 ; 53.46,60.734 53.534,60.734 74.7,81.9 ; 60.087,53.887 81.3,75.1 ; 61.648,5.499 61.648,5.394 81.25,-14.208
  lines w0.254: -21.213,74.213 cw(c-13.563,74.263) -13.613,81.913 ; -21.2,-14.2 ccw(c-14.25,-14.25) -14.3,-21.2 ; 0.066,52.96 cw(c-40.8,30) 0.1,7.1 ; 6.9,0 cw(c29.86,-40.866) 52.912,-0.052 ; 7.6,60.7 ccw(c30.5,101.6) 53.46,60.734 ; 60.087,53.835 ccw(c100.987,30.935) 61.648,5.446 ; 74.307,-21.207 ccw(c74.279,-14.236) 81.25,-14.208 ; 74.7,81.9 cw(c74.6,75.2) 81.3,75.1

## Other copper
Top Layer:
  region net IA: 27.8,30.7 30.4,30.7 30.4,24.6 27.8,24.6
  region net NetR35_2: 41.15,10.95 41.175,10.925 44.25,10.925 44.35,10.825 44.35,10.05 41.125,10.05 41.125,10.95
  region net A0: 27.325,20.7 29.375,20.7 29.375,19.75 29,19.375 27.45,19.375 27.325,19.5
  region net GND: 31,28.2 30.9,28.1 30.9,23.6 31.4,23.1 33.4,23.1 33.8,23.5 33.8,28.1 33.7,28.2
  region net ISUM: 36.107,30.823 35.2,29.916 35.2,24.6 38.1,24.6 41.8,24.6 42.05,24.85 42.05,28 39.3,28 39.3,30.8
  region net IC: 44.107,30.823 46.707,30.823 46.707,24.723 44.107,24.723
  region net ISUM: 36.107,30.823 38.707,30.823 38.707,24.723 36.107,24.723
  region net MCU_5V: 25.4,17.7 28.5,17.7 28.5,16.8 25.4,16.8
  region net A11: 50.7,51.7 50.7,50 51.3,49.4 52.7,49.4 52.7,50.5 52.9,50.7 52.9,51.7
  region net NetQ11_1: 53.2,51.7 53.2,49.2 55.7,49.2 55.7,51.7
  region net PC: 51,45.1 42.1,45.1 41,44 41,37.8 43.3,37.8 43.4,37.7 43.5,37.8 43.5,42.5 45,42.5 51,42.5
  region net HO3: 39.392,44.488 39.392,39.788 39.592,39.588 40.692,39.588 40.692,44.388 40.592,44.488
  region net HO2: 30.792,44.388 30.792,39.688 30.992,39.488 32.092,39.488 32.092,44.288 31.992,44.388
  region net PB: 36.6,44.4 32.8,44.4 32.3,43.9 32.3,37 35,37 35,42.1 35.3,42.4 36.6,42.4
  region net PA: 29.2,44.4 25.4,44.4 25.2,44.2 25.2,38.4 27.7,38.4 27.8,38.5 27.8,42.5 29.2,42.5
  region net HO1: 23.5,44.3 23.5,39.6 23.7,39.4 24.8,39.4 24.8,44.2 24.7,44.3
  region net 3.3V: 21,51.3 21,46.8 20.7,46.5 20.7,44 22.3,44 22.3,46.6 22.1,47.3 22.1,51.3
  region net V_Bat_MCU: 20.3,34.4 22.1,34.4 22.3,34.2 22.3,32.3 21.9,31.9 20.3,31.9
  region net V_Bat: 22.9,51.3 22.5,51.3 22.5,52.1 19.6,52.1 19.6,52.9 20.1,53.4 22.9,53.4
  region net V_Bat: 17.2,55.9 23.3,54.575 26.4,53.3 26.4,50.6 26.1,50.3 22.9,50.3 22.9,52.9 17.2,52.9
  region net V_Bat: 17.5,50.2 14.9,50.2 14.9,55.3 15.5,55.9 17.5,55.9
  region net V_Bat: 22.9,53 23.2,53.3 44.7,53.3 45.6,52.4 45.6,46.9 44.5,45.8 22.9,45.8
Bottom Layer:
  region net ISUM: 37.5,29.875 22.129,29.875 21.5,29.12 21.5,26.3 37.1,26.3 37.5,26.7
  region net GND: 17.4,26.5 20.7,26.5 20.7,24.5 30.7,24.5 30.7,25.3 31.2,25.8 33.4,25.8 34.2,25 34.2,22.3 32.1,20.2 18,20.2 17.4,20.8
  region net PA: 51.1,36.6 28.4,36.6 26.2,34.4 26.2,32.275 51.1,32.275
  region net PB: 51.2,41.7 51.2,37.6 51,37.4 31.7,37.4 31.7,40.3 33.1,41.7

## Silkscreen, mask and mechanical layers (free items; w line width, h text height)
Top Overlay:
  lines w0.15: 165.1,101.1 171.1,101.1 171.1,111.1 165.1,111.1 165.1,101.1
  lines w0.2: 14.175,43.2 15.025,44.05 15.025,49.05 15.375,48.7 ; 18.625,15.9 21.375,15.9 22.75,14.525 ; 22.025,14.4 22.15,14.525 22.75,14.525 ; 22.625,49.4 22.625,48.625 ; 22.75,15.15 22.75,14.525 ; 23.175,19.25 25,19.25 25.9,18.35 25.9,17.898 25.852,17.898 25.275,18.475 ; 23.325,48.625 22.625,48.625 ; 23.825,51.9 23.825,49.825 22.625,48.625 ; 25.874,17.924 26.5,18.55 ; 26.8,40 27.175,39.625 ; 27.175,42.125 27.175,39.625 ; 27.575,40 27.575,39.95 27.25,39.625 27.175,39.625 ; 49.025,48.7 49.45,48.7 50.85,50.1 ; 50.075,50.1 50.85,50.1 ; 50.85,49.375 50.85,50.1 ; 15.05,17.65 15.05,19.725 22.825,19.725 22.825,17.65 21.95,16.775 15.925,16.775 15.05,17.65 ; 16.95,23.125 16.95,30.875 17.55,31.475 20.9,31.475 20.95,31.425 20.95,23.85 20.225,23.125 16.95,23.125
  text "Charg" at 165.1,112.571 h2.5
  text "PC" at 51.523,43.046 h2.5
  text "PB" at 51.348,38.43 h2.5
  text "PA" at 51.023,33.046 h2.5
  text "Bat" at 16.545,23.325 h2.5 r90
Bottom Overlay:
  text "4-Axle drone V1" at 45.95,45.316 h5
  text "Kevin No.0" at 45.875,42.296 h2.5
  text "2022.8.28" at 45.825,39.749 h2.5

## Text inside footprints (layer, text, board x,y; h text height)
J7: Top Overlay "8" at 12.762,6.627 h0.89 r195; Top Overlay "1" at 22.591,11.957 h0.89 r195; Top Overlay "2" at 23.53,9.632 h0.89 r195; Top Overlay "7" at 11.873,8.977 h0.89 r195; Bottom Overlay "7" at 11.428,8.703 h0.89 r195; Bottom Overlay "1" at 22.168,11.87 h0.89 r195; Bottom Overlay "2" at 22.767,9.401 h0.89 r195; Bottom Overlay "8" at 12.031,6.419 h0.89 r195
J8: Top Overlay "1" at 39.704,7.398 h0.89 r345; Top Overlay "3" at 47.994,5.361 h0.89 r345; Bottom Overlay "1" at 40.115,7.262 h0.89 r345; Bottom Overlay "3" at 48.522,5.272 h0.89 r345
J9: Top Overlay "1" at 58.523,8.313 h0.89 r115; Top Overlay "4" at 53.696,18.366 h0.89 r115; Bottom Overlay "1" at 58.364,8.715 h0.89 r115; Bottom Overlay "4" at 53.424,18.828 h0.89 r115
J10: Top Overlay "6" at 5.446,7.923 h0.89 r70; Top Overlay "1" at 10.722,22.418 h0.89 r70
LED2: Top Overlay "+" at 79.356,-14.401 h1.02 r225
LED3: Top Overlay "+" at -18.458,74.299 h1.02 r45
LED4: Top Overlay "+" at 73.801,79.056 h1.02 r315
LED5: Top Overlay "+" at -13.701,-17.956 h1.02 r135